# Altium PCB transmitter_PCB.PcbDoc
Units mil, origin at the board's own origin, x right, y up, seen from the top; angles counter-clockwise.
Board outline 5920.03 x 3950.03 mil, 2 copper layers (Top Layer, Bottom Layer); 7 components, 6 nets, 16 pads, 0 vias.
Unrouted connection lines stored in the file: 3.
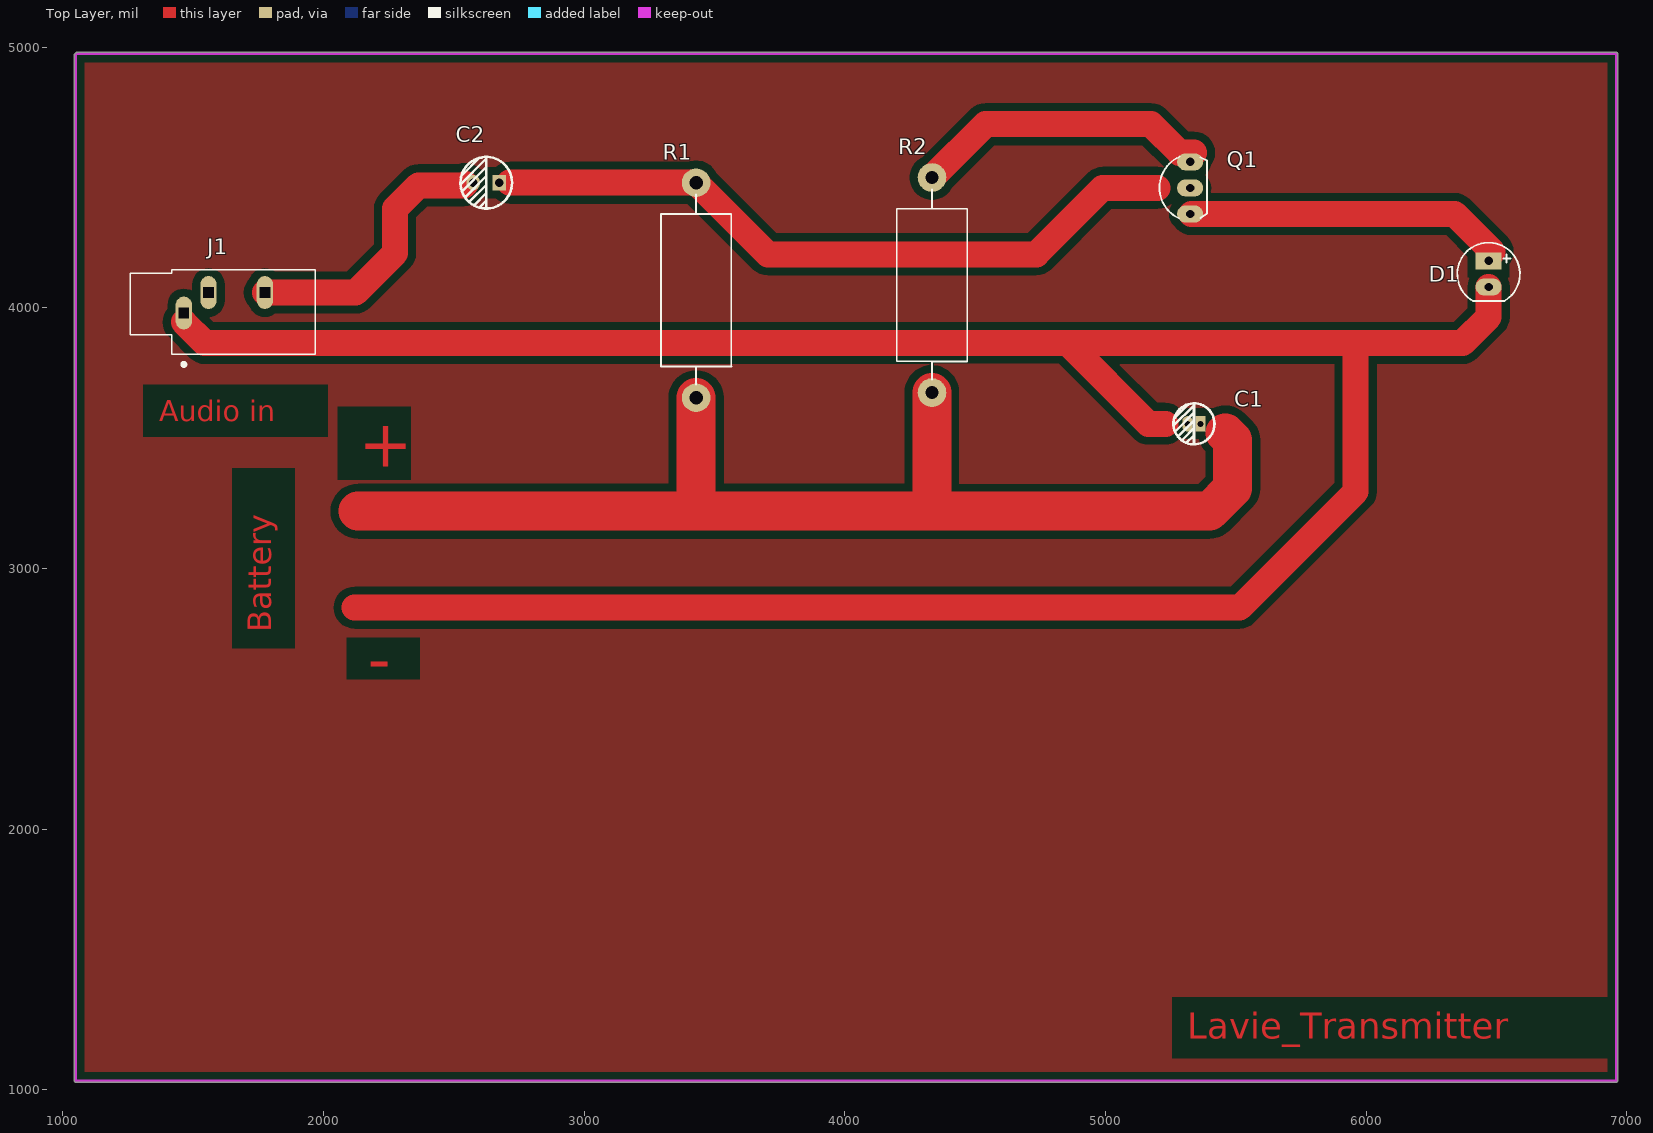
[diagram p0: Top Layer view]
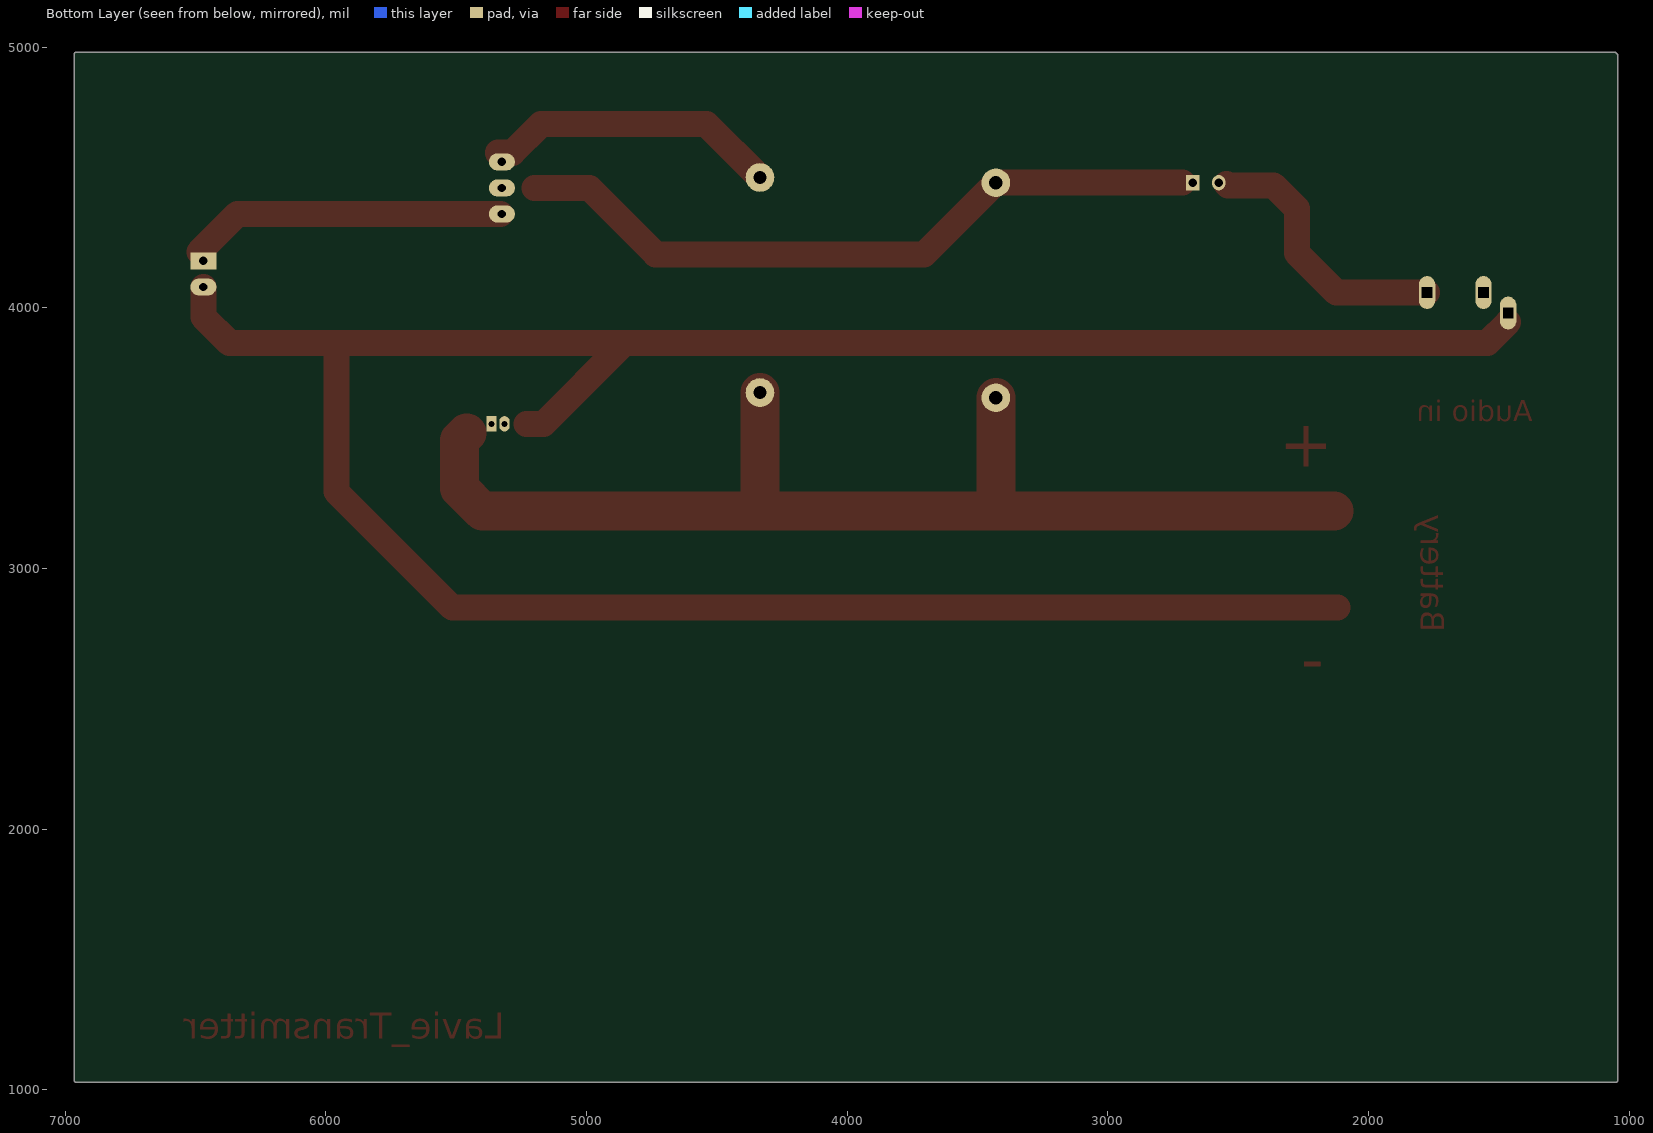
[diagram p1: Bottom Layer view, seen from below]
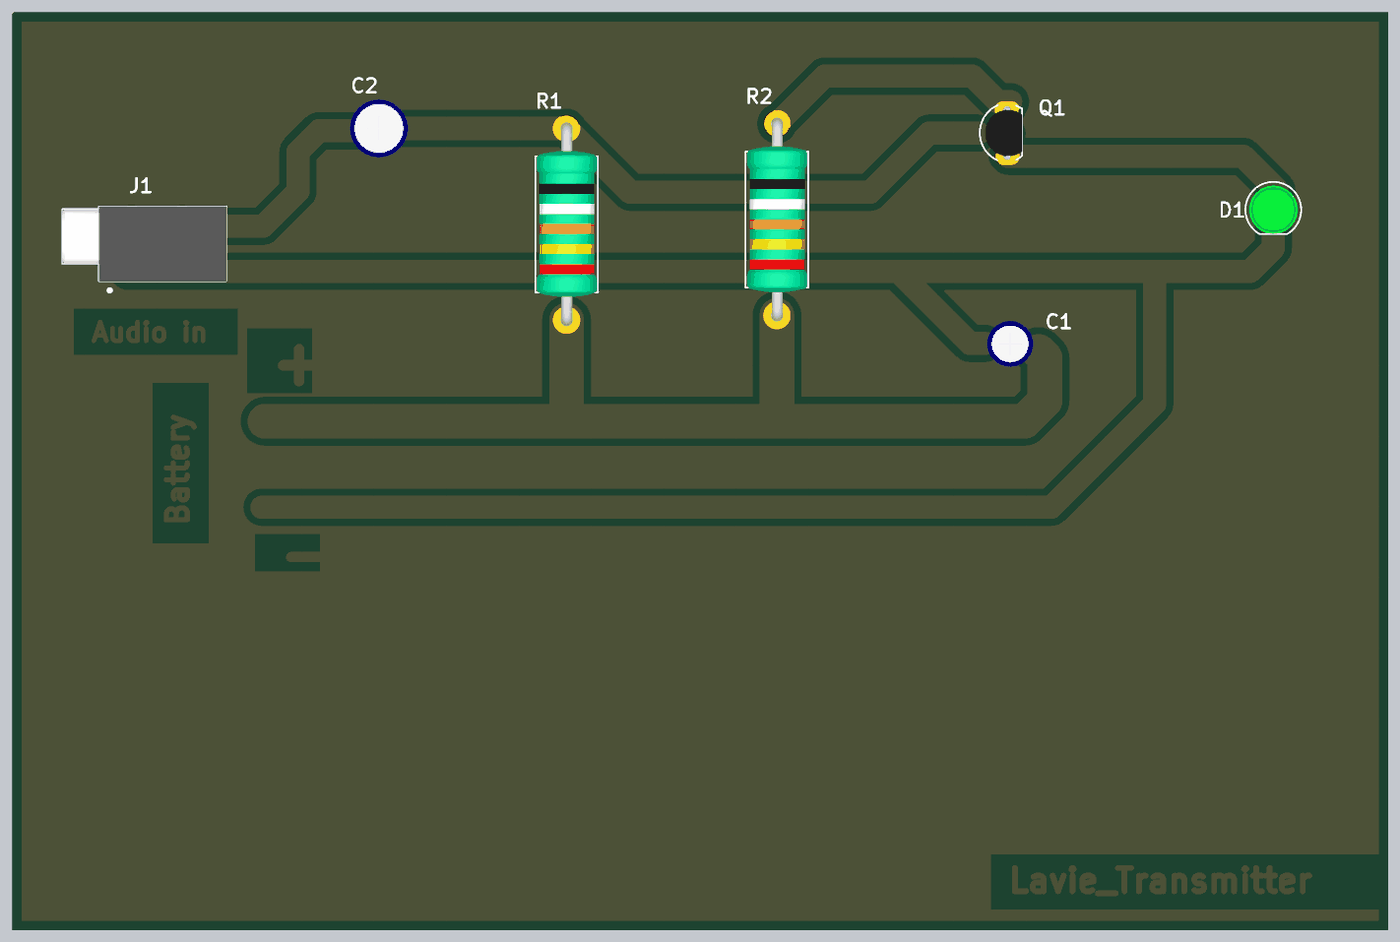
[diagram p2: 3D render of the assembled board from above, using the file's embedded part models]

## Layer stack, top to bottom
Top Solder: solder mask 0.4, Solder Resist, Dk 3.5
Top Layer: signal copper 1.4
Dielectric 1: dielectric 12.6, FR-4, Dk 4.8
Bottom Layer: signal copper 1.4
Bottom Solder: solder mask 0.4, Solder Resist, Dk 3.5

## Board outline
1044.98,1035 1044.98,4970 cw(c1050,4970) 1049.98,4975.02 cw(c1055,4975) 1055,4980.02 6960,4980.02 cw(c6960,4975) 6965.02,4975 6965.02,1035 cw(c6960,1035) 6960,1029.98 1050,1029.98 cw(c1050,1035)

## Design rules (kind name [scope] priority, off if disabled: settings)
Clearance [All] p1: gap=30 ignorepadtopadclearanceinfootprint=FALSE
PolygonConnect [All] p1: connectstyle=Relief reliefconductorwidth=10 reliefentries=4 polygonreliefangle="90 Angle" airgapwidth=10
RoomDefinition transmitter_SCH [InComponentClass('transmitter_SCH')] p1: confinementstyle=ConfineIn formatcopy=TRUE lockcomponents=FALSE outline 1050,1035 6960,1035 6960,4965 1050,4965
RoutingVias [All] p1: holewidth=28 width=50 viastyle="Through Hole" minholewidth=28 minwidth=50 maxholewidth=28 maxwidth=50
SolderMaskExpansion [All] p1: expansion=4 istentingtop=FALSE
Width [All] p1: maxlimit=150 minlimit=50 preferedwidth=100 minimp=50.000000 maximp=50.000000 favimp=50.000000
30 further rules are at their usual default settings.

## Classes and differential pairs
component class transmitter_SCH: C1 C2 J1 Q1 R2

## Components (designator, comment, footprint, x,y, rotation, side; value= is the part's Value field where it differs from the comment)
C1 "10uF" "tu hoa 4mm" 5340,3555 r180 top
C2 "4.7uF" "tu hoa 5mm" 2625,4480 r180 top
D1 "Photo Diode" "LED-5 GRe" 6470,4180 r270 top
J1 "jack audio" CUI_SJ1-3533N 1465,3980 r0 top
Q1 "S8050" TO92-123 5325,4460 r90 top value=C1815
R1 "300K" RES-2W 3435,4060 r90 top
R2 "100" RES-2W 4340,4080 r90 top

## Footprints (in the part's own frame and the unit in brackets; to place one, negate y for a bottom-side part, rotate by r counter-clockwise, add the part's x,y. Pads: shape width x height; smd on the part's side, far side on the other; paste and mask are expansions set on the pad)
CUI_SJ1-3533N [mm]
  oval 1.6x3.2 hole 1 square: 1(0,0) 2(2.4,2) 3(7.9,2)
  silkscreen extent -5.2,-5.17 12.8,4.2, body extent -5.19,-4.01 12.81,4.19, height 14.19
"LED-5 GRe" [mil] "LED 2 PIN, 5 ly , Only colour,pin to pin 100mil"
  rect 65x100 hole 32: 1(0,0)
  oval 65x100 hole 32: 2(100,0)
  silkscreen extent -70,-120 154,120, body extent -54,-104 154,105, height 337
RES-2W [mil] "R2W, 2 pin, 700mil"
  round 110 hole 51.18: 1(-405,5) 2(420,5)
  silkscreen extent -355,-130 375,140, body extent -428,-126 446,134, height 277
TO92-123 [mil] "TO-92"
  oval 66x100 hole 32: 1(-100,0) 2(0,0) 3(100,0)
  silkscreen extent -117,-65 120,118, body extent -109,-66 109,95, height 245
"tu hoa 4mm" [mm]
  rect 1x1.5 hole 0.6: 1(-0.635,0)
  oval 1x1.5 hole 0.6: 2(0.635,0)
  silkscreen extent -2,-2 2.01,2.01, body extent -2.47,-2.47 2.58,2.58, height 14.81
"tu hoa 5mm" [mm]
  rect 1.3x1.5 hole 0.8: 1(-1.27,0)
  oval 1.3x1.5 hole 0.8: 2(1.27,0)
  silkscreen extent -2.51,-2.51 2.51,2.51, body extent -3.12,-3.18 3.23,3.18, height 14.55

## Part data
C1: library part "Tu Hoa 10uF 16V 4x7", "Cắm", Chung_Loai=Cắm, Don_Vi=Con, Ma_Hang=MH006855, So_Chan=2, Ten_Linh_Kien="Tụ Hóa 10uF 16V"
C2: library part "Tu Hoa 4.7uF 50V 5x11", "Cắm", Chung_Loai=Cắm, Don_Vi=Con, Ma_Hang=MH001357, So_Chan=2, Ten_Linh_Kien="Tụ Hóa 4.7uF 50V 5x11MM"
D1: "Photosensitive Diode"
Q1: library part 2N904, "NPN 600mW, ECB"
R1 R2: library part Res, "Res", Manufacturer="Generic Components", Class=Passive, Published=08/06/2000, Publisher="Altium Hobart Technology Centre", SubClass=R

## Nets (pads, with @x,y where several pads share a name; then routed paths per layer and width w, separated by ;. In a path a pad name is that pad's centre, name@x,y a point inside that pad or via, vN(x,y) a via of type N, cw(c..) or ccw(c..) an arc to the next point about the centre after c; other vN are vias at no path point)
GND: C1.2 D1.2 J1.1 | length 10292.3
  Top Layer w100: J1.1@1465,3945 1545,3865 4855,3865 ; 2120,2850 5515,2850 5960,3295 5960,3865 ; 5230,3555 5165,3555 4855,3865 ; D1.2 6470,3965 6370,3865 5960,3865 ; 4855,3865 5960,3865
NetC2_1: C2.1 Q1.2 R1.2 | length 2704.5
  Top Layer w100: 2715,4480 R1.2 3705,4205 4735,4205 4990,4460 5200,4460
NetC2_2: C2.2 J1.3 | length 1041
  Top Layer w100: J1.3 2123.74,4058.74 2275,4210 2275,4380 2365,4470 2540,4470 2545,4475
NetD1_1: D1.1 Q1.1 | length 1215.1
  Top Layer w100: Q1.1@5330,4360 6340,4360 6485,4215
NetQ1_3: Q1.3 R2.2 | length 1161.2
  Top Layer w15: R2.2 R2.2@4353.18,4481.82
  Top Layer w100: R2.2 4540,4705 5175,4705 5285,4595 5340,4595
VCC: C1.1 R1.1 R2.1 | length 4504.7
  Top Layer w150: 2133.21,3220 3430,3220 ; R1.1 3430,3220 ; R2.1 4335,3220 ; 5460,3520 5487.87,3492.13 5487.87,3307.87 5400,3220 4335,3220 ; 3430,3220 4335,3220
pads on no net: J1.2

## Polygon pours and split planes (outlines as drawn)
no net on Top Layer "NONET_L01_P000" (solid, pour order 0): 1050,4970 1055,4975 6960,4975 6960,1035 1050,1035

## Keep-outs
Top Layer:
  lines w10: 1050,4970 1050,1035 6960,1035 6960,4975 1055,4975 6925,4975

## Other copper
Top Layer:
  text "Audio in" at 1370,3565 h80
  text "+" at 2135,3390.01 h180
  text "Battery" at 1800.01,2755 h90 r90
  text "-" at 2170,2565.03 h180
  text "Lavie_Transmitter" at 5315,1196.66 h100